# Altium PCB Gagabiro_supply.PcbDoc
Units mm, origin at the board's own origin, x right, y up, seen from the top; angles counter-clockwise.
Board outline 119.89 x 120.02 mm, 2 copper layers (Top Layer, Bottom Layer); 58 components, 26 nets, 129 pads, 2 vias.
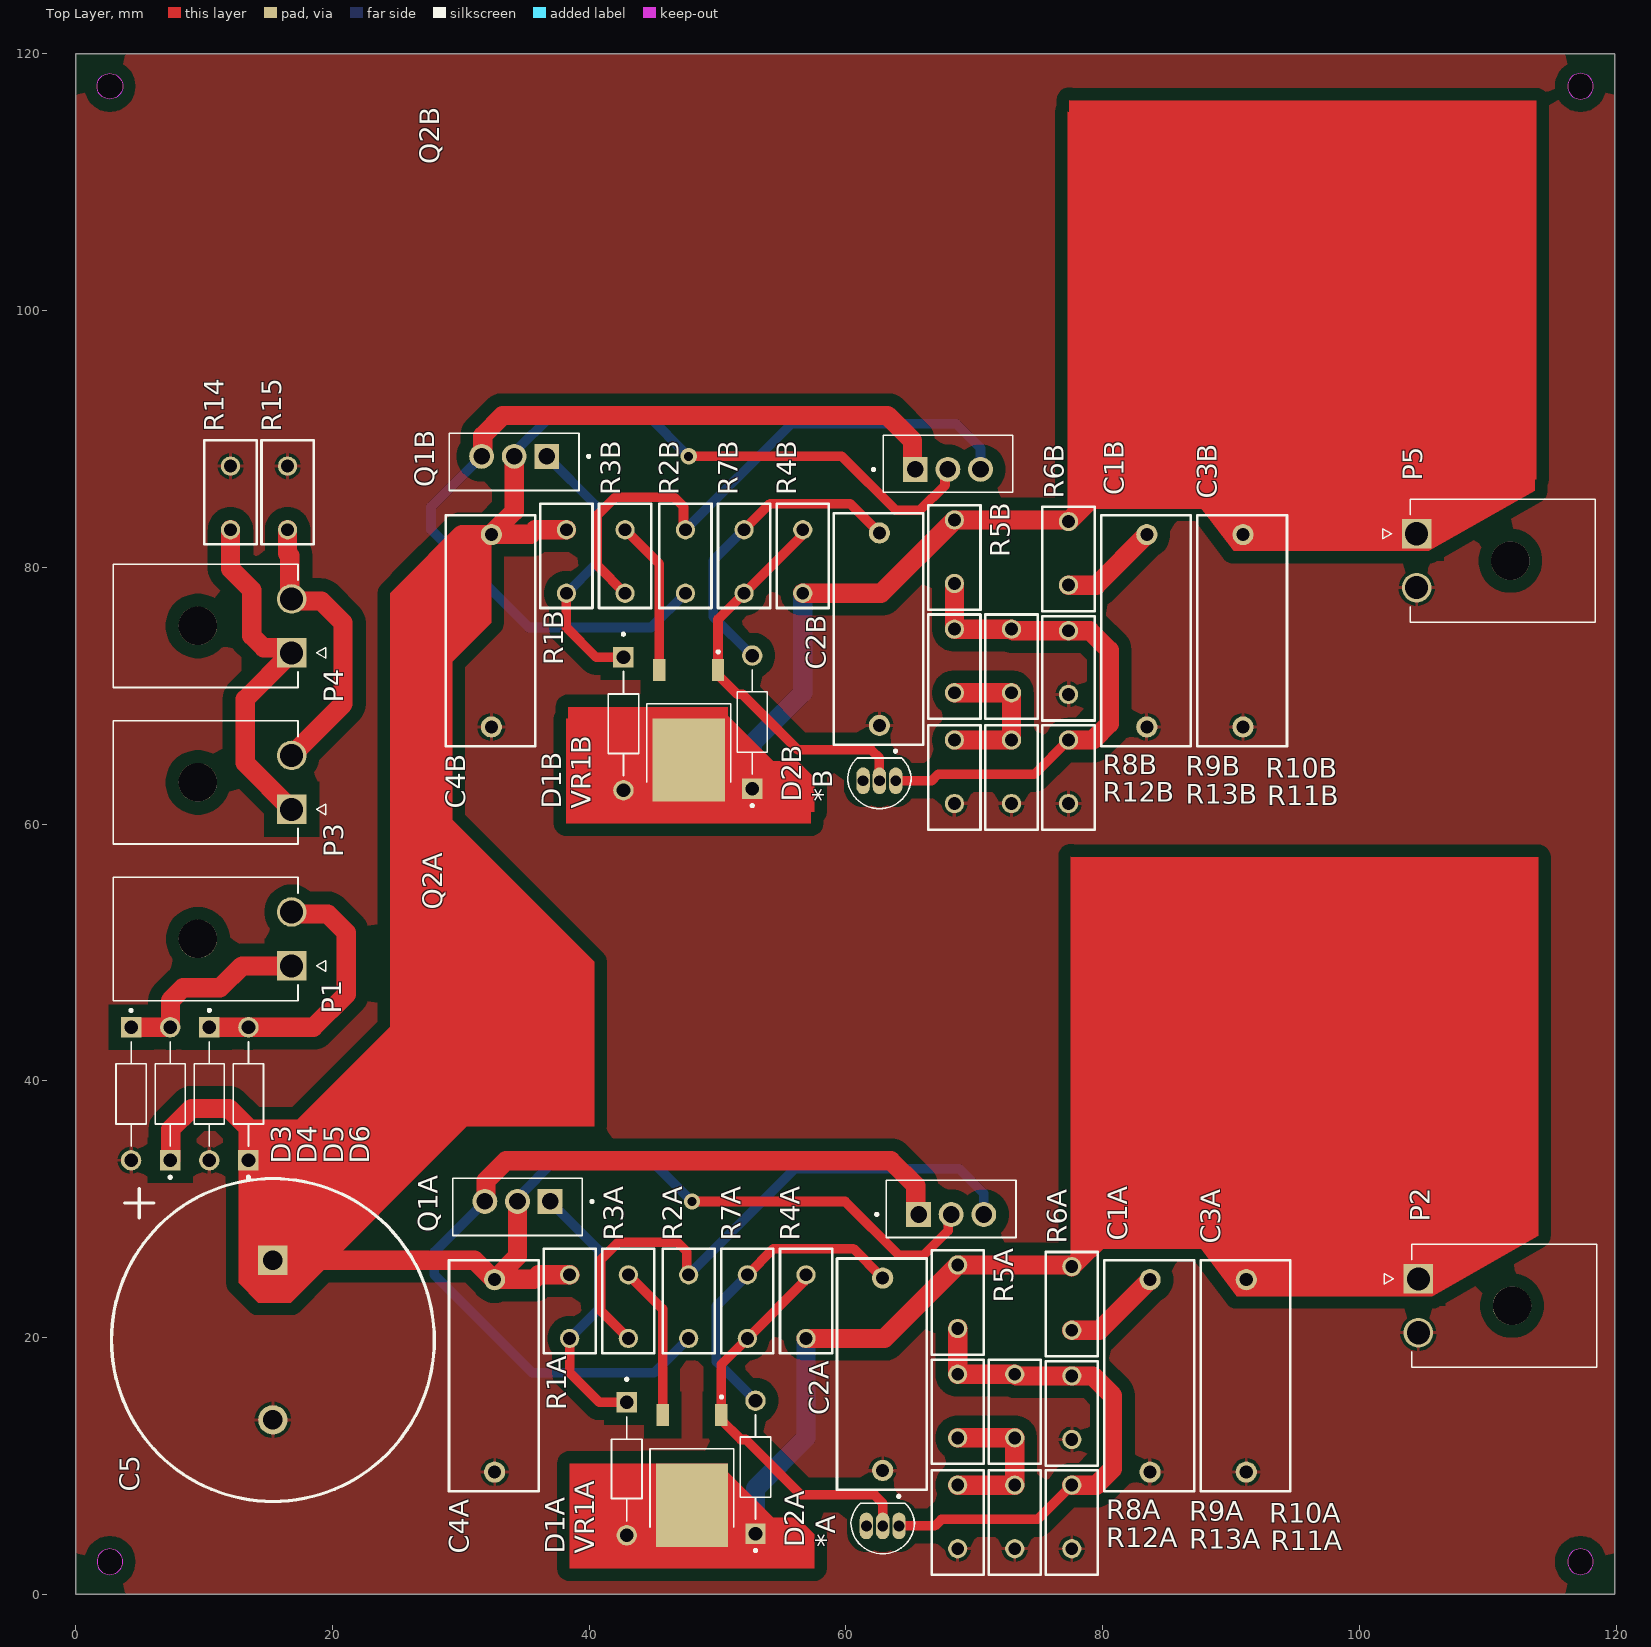
[diagram p0: Top Layer view]
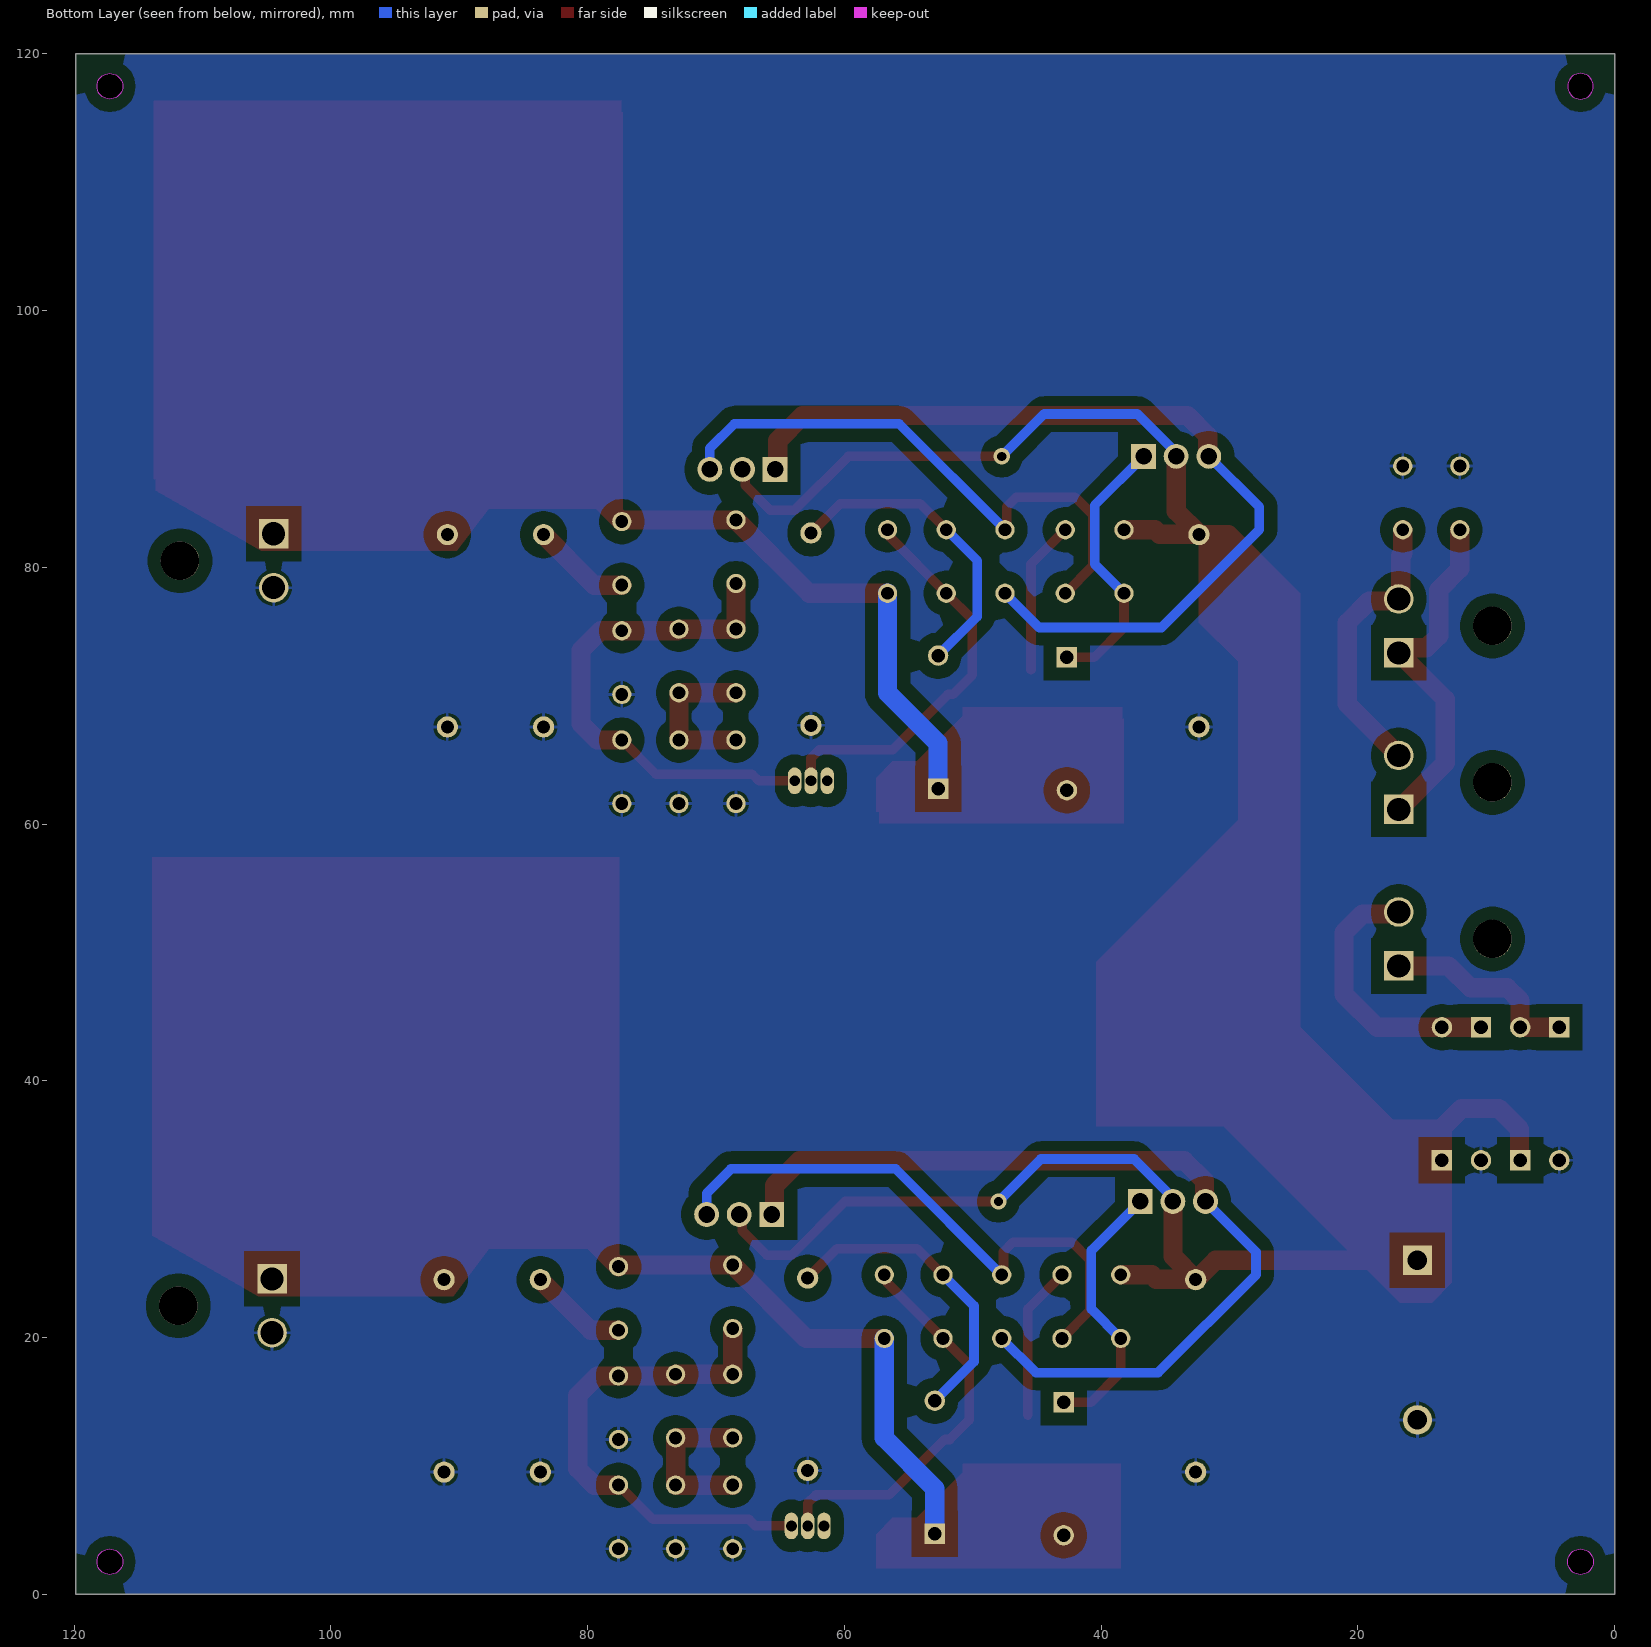
[diagram p1: Bottom Layer view, seen from below]
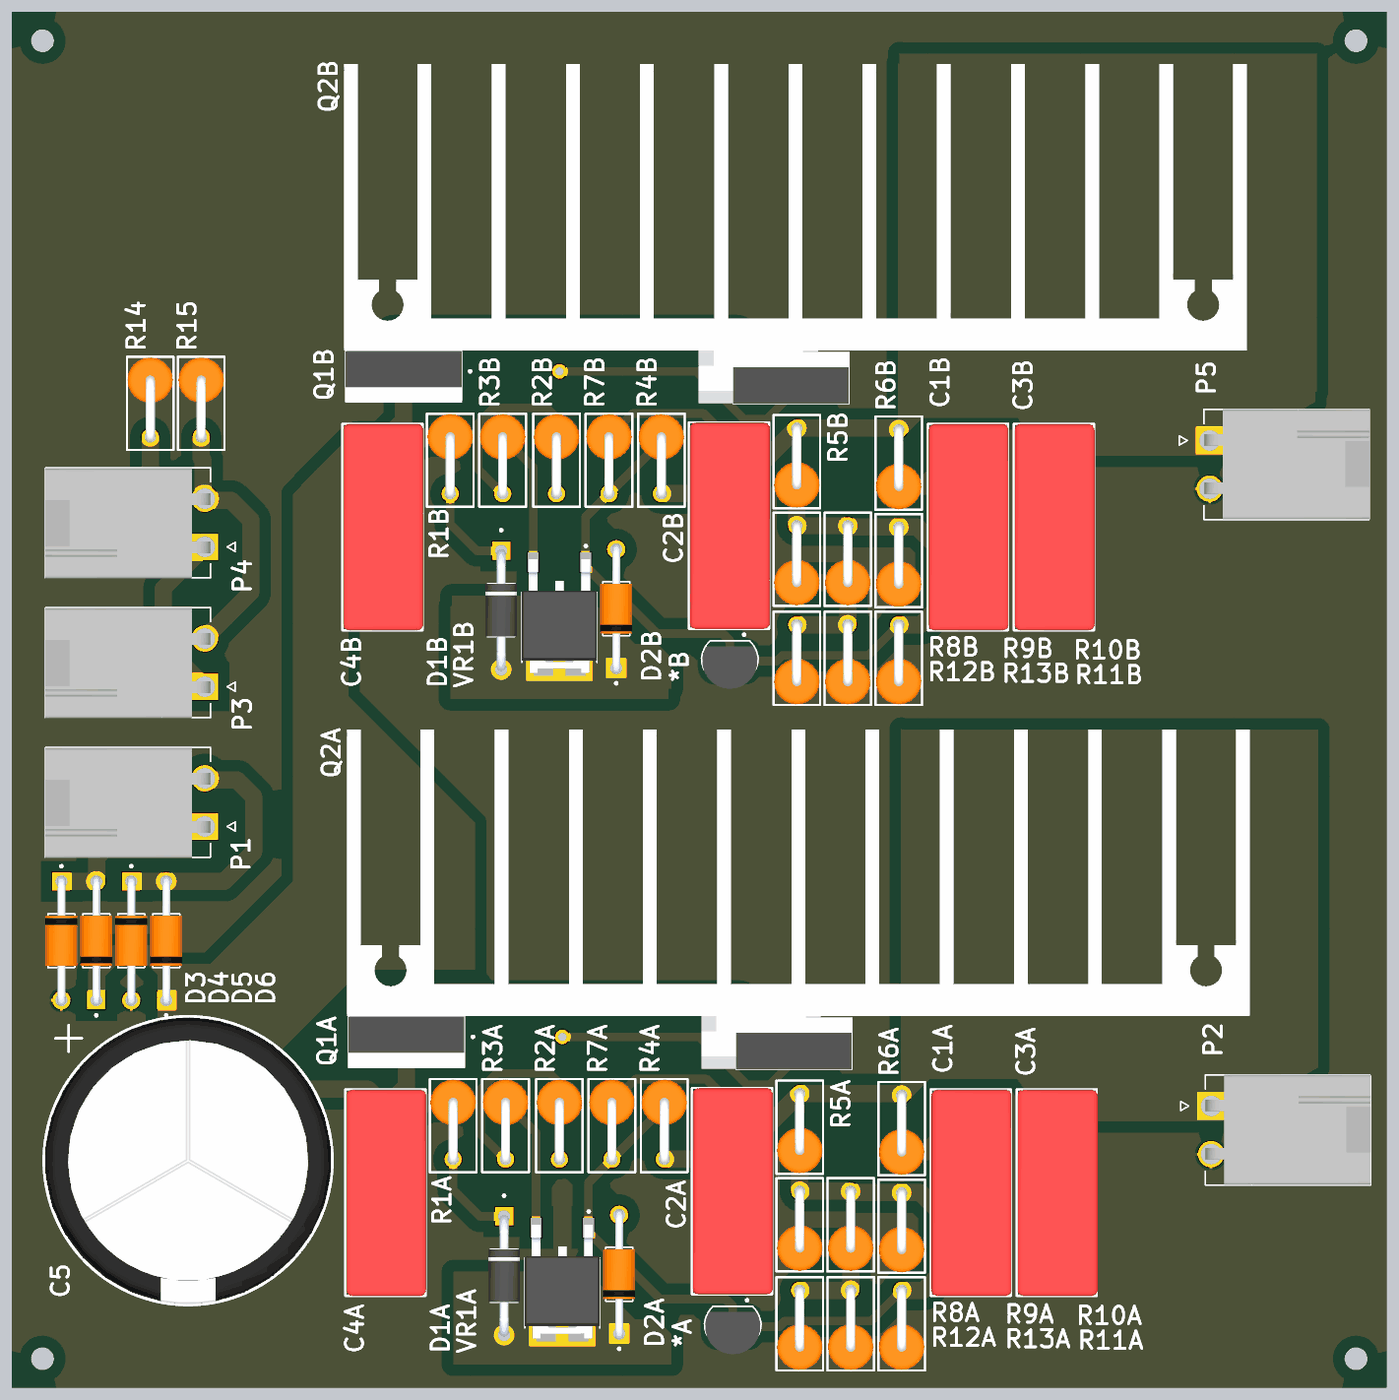
[diagram p2: 3D render of the assembled board from above, using the file's embedded part models]

## Layer stack, top to bottom
Top Solder: solder mask 0.0102, Solder Resist, Dk 3.5
Top Layer: signal copper 0.0356
Dielectric 1: dielectric 0.32, FR-4, Dk 4.8
Bottom Layer: signal copper 0.0356
Bottom Solder: solder mask 0.0102, Solder Resist, Dk 3.5

## Board outline
0,0 0,120.015 119.888,120.015 119.888,0
cut-out: 1.667,2.54 ccw(c2.667,2.54) 2.667,1.54 ccw(c2.667,2.54) 3.667,2.54 ccw(c2.667,2.54) 2.667,3.54 ccw(c2.667,2.54)
cut-out: 2.667,116.475 cw(c2.667,117.475) 1.667,117.475 cw(c2.667,117.475) 2.667,118.475 cw(c2.667,117.475) 3.667,117.475 cw(c2.667,117.475)
cut-out: 116.221,2.54 ccw(c117.221,2.54) 117.221,1.54 ccw(c117.221,2.54) 118.221,2.54 ccw(c117.221,2.54) 117.221,3.54 ccw(c117.221,2.54)
cut-out: 116.221,117.475 ccw(c117.221,117.475) 117.221,116.475 ccw(c117.221,117.475) 118.221,117.475 ccw(c117.221,117.475) 117.221,118.475 ccw(c117.221,117.475)

## Design rules (kind name [scope] priority, off if disabled: settings)
AssemblyTestpoint [All] p1: testpointundercomponent=TRUE minsize=1.016 maxsize=2.54 preferedsize=1.524 minholesize=0 maxholesize=1.016 preferedholesize=0.813 testpointgrid=0.025 usegrid=TRUE gridoriginx=27.559 gridoriginy=8.382 gridtolerance=0 allowsidetop=TRUE allowsidebottom=TRUE
Clearance Clearance_1 [InNet('MAIDA_OUT1') vs All -  InNet('MAIDA_OUT1') - OnLayer('Top Overlay')] p1: gap=1 ignorepadtopadclearanceinfootprint=FALSE
Clearance Clearance_2 [InNet('MAIDA_OUT1') vs All -  InNet('MAIDA_OUT1') - OnLayer('Top Overlay')] p2: gap=1 ignorepadtopadclearanceinfootprint=FALSE
Clearance Clearance_4 [InNamedPolygon('GND_L02_P001')] p3: gap=1 ignorepadtopadclearanceinfootprint=FALSE
Clearance Clearance_3 [InNamedPolygon('GND_L01_P000')] p4: gap=1 ignorepadtopadclearanceinfootprint=FALSE
Clearance Clearance_1 [OnMid vs OnMid] p5: gap=0.254 ignorepadtopadclearanceinfootprint=FALSE sourcerule=41 cellrowname=All cellrowtype=0 cellcolname=All cellcoltype=0 innerlayers=TRUE
Clearance Clearance_2 [(ExistsOnLayer('Top Layer') Or ExistsOnLayer('Bottom Layer')) vs (ExistsOnLayer('Top Layer') Or ExistsOnLayer('Bottom Layer'))] p6: gap=0.254 ignorepadtopadclearanceinfootprint=FALSE sourcerule=41 cellrowname=All cellrowtype=0 cellcolname=All cellcoltype=0 outerlayers=TRUE
Clearance [All] p7: gap=0.254 ignorepadtopadclearanceinfootprint=FALSE ismatrix=TRUE
FabricationTestpoint [All] p1: side=3 testpointundercomponent=TRUE minsize=1.016 maxsize=2.54 preferedsize=1.524 minholesize=0 maxholesize=1.016 preferedholesize=0.813 testpointgrid=0.025 allowsidetop=TRUE allowsidebottom=TRUE usegrid=TRUE gridoriginx=27.559 gridoriginy=8.382 gridtolerance=0
Height [All] p1: minheight=0 maxheight=254 prefheight=12.7
HoleSize [All] p1: absolutevalues=TRUE maxlimit=25.4 minlimit=0.025 maxpercent=80.000 minpercent=20.000
HoleToHoleClearance [All] p1: gap=0.152 allowstackedmicrovias=TRUE
PolygonConnect [All] p1: connectstyle=Relief reliefconductorwidth=0.254 reliefentries=4 polygonreliefangle="90 Angle" airgapwidth=0.254
RoutingVias [All] p1: holewidth=0.711 width=1.27 viastyle="Through Hole" minholewidth=0.711 minwidth=1.27 maxholewidth=0.711 maxwidth=1.27
SolderMaskExpansion [All] p1: expansion=0.102 istentingtop=FALSE
SupplyNets "Schematic Supply Nets" [InNet('GND')] p1: voltage=0.000
Width MaxMinWidth_1 [All] p1: maxlimit=3 minlimit=0.75 preferedwidth=1.5 minimp=50.000000 maximp=50.000000 favimp=50.000000
25 further rules are at their usual default settings.

## Classes and differential pairs
net class MAIDA_OUT[1..2]: MAIDA_OUT1 MAIDA_OUT2
net class MAIDA_IN[1..2]: MAIDA_IN1
channel class Gagabiro_supply_maida: U_Gagabiro_supply_maida1 U_Gagabiro_supply_maida2
component class U_Gagabiro_supply_maida2: *B C1B C2B C3B C4B D1B D2B Q1B Q2B R1B R2B R3B R4B R5B R6B R7B R8B R9B R10B R11B R12B R13B VR1B
component class U_Gagabiro_supply_maida1: *A C1A C2A C3A C4A D1A D2A Q1A Q2A R1A R2A R3A R4A R5A R6A R7A R8A R9A R10A R11A R12A R13A VR1A
component class U_Gagabiro_supply_interface: P1 P2 P3 P4 P5 R14 R15
component class U_Gagabiro_supply_acdc_converter: C5 D3 D4 D5 D6

## Components (designator, comment, footprint, x,y, rotation, side; value= is the part's Value field where it differs from the comment)
*A "LM329" TO92127P495H495-3 62.865,5.334 r0 top (schematic designator *)
*B "LM329" TO92127P495H495-3 62.611,63.373 r0 top (schematic designator *)
C1A "1uF" CAP_panassonic_1u_450V 83.693,9.525 r90 top (schematic designator C1)
C1B "1uF" CAP_panassonic_1u_450V 83.439,67.564 r90 top (schematic designator C1)
C2A "1uF" CAP_panassonic_1u_450V 62.865,9.652 r90 top (schematic designator C2)
C2B "1uF" CAP_panassonic_1u_450V 62.611,67.691 r90 top (schematic designator C2)
C3A "1uF" CAP_panassonic_1u_450V 91.186,9.525 r90 top (schematic designator C3)
C3B "1uF" CAP_panassonic_1u_450V 90.932,67.564 r90 top (schematic designator C3)
C4A "1uF" CAP_panassonic_1u_450V 32.639,9.525 r90 top (schematic designator C4)
C4B "1uF" CAP_panassonic_1u_450V 32.385,67.564 r90 top (schematic designator C4)
C5 "CAP_EL_220u_450V" CAPPRD500W50D630H1120_stand_25x50 15.367,19.812 r270 top value=220uF
D1A "1N4735A" DIOAD1036W78L463D272 42.926,9.779 r270 top (schematic designator D1)
D1B "1N4735A" DIOAD1036W78L463D272 42.672,67.818 r270 top (schematic designator D1)
D2A "1N4001G" DIOAD1036W78L470D235 52.959,9.906 r90 top (schematic designator D2)
D2B "1N4001G" DIOAD1036W78L470D235 52.705,67.945 r90 top (schematic designator D2)
D3 "1N4001G" DIOAD1036W78L470D235 4.318,38.989 r270 top
D4 "1N4001G" DIOAD1036W78L470D235 7.366,38.989 r90 top
D5 "1N4001G" DIOAD1036W78L470D235 10.414,38.989 r270 top
D6 "1N4001G" DIOAD1036W78L470D235 13.462,38.989 r90 top
P1 "1726480102" MOLEX_1726480102 16.825,48.954 r270 top
P2 "1726480102" MOLEX_1726480102 104.587,24.579 r90 top
P3 "1726480102" MOLEX_1726480102 16.825,61.146 r270 top
P4 "1726480102" MOLEX_1726480102 16.825,73.338 r270 top
P5 "1726480102" MOLEX_1726480102 104.46,82.618 r90 top
Q1A "TIP50" TO254P1009X445X1985-3 34.417,30.607 r180 top (schematic designator Q1)
Q1B "TIP50" TO254P1009X445X1985-3 34.163,88.646 r180 top (schematic designator Q1)
Q2A "TIP50_heatsink" TO254P1009X445X1985-3_heatsink 68.199,29.591 r0 top (schematic designator Q2)
Q2B "TIP50_heatsink" TO254P1009X445X1985-3_heatsink 67.945,87.63 r0 top (schematic designator Q2)
R1A "100K" RES_2W_vertical 38.481,24.892 r270 top (schematic designator R1)
R1B "100K" RES_2W_vertical 38.227,82.931 r270 top (schematic designator R1)
R2A "1k" RES_2W_vertical 47.752,24.892 r270 top (schematic designator R2)
R2B "1k" RES_2W_vertical 47.498,82.931 r270 top (schematic designator R2)
R3A "10R" RES_2W_vertical 43.053,24.892 r270 top (schematic designator R3)
R3B "10R" RES_2W_vertical 42.799,82.931 r270 top (schematic designator R3)
R4A "1K5" RES_2W_vertical 56.896,24.892 r270 top (schematic designator R4)
R4B "1K5" RES_2W_vertical 56.642,82.931 r270 top (schematic designator R4)
R5A "1k" RES_2W_vertical 68.707,20.701 r90 top (schematic designator R5)
R5B "1k" RES_2W_vertical 68.453,78.74 r90 top (schematic designator R5)
R6A "2R7" RES_2W_vertical 77.597,20.574 r90 top (schematic designator R6)
R6B "2R7" RES_2W_vertical 77.343,78.613 r90 top (schematic designator R6)
R7A "100R" RES_2W_vertical 52.324,24.892 r270 top (schematic designator R7)
R7B "100R" RES_2W_vertical 52.07,82.931 r270 top (schematic designator R7)
R8A "36K" RES_2W_vertical 68.707,12.192 r90 top (schematic designator R8)
R8B "36K" RES_2W_vertical 68.453,70.231 r90 top (schematic designator R8)
R9A "36K" RES_2W_vertical 73.152,12.192 r90 top (schematic designator R9)
R9B "36K" RES_2W_vertical 72.898,70.231 r90 top (schematic designator R9)
R10A "NC" RES_2W_vertical 77.597,12.065 r90 top (schematic designator R10)
R10B "NC" RES_2W_vertical 77.343,70.104 r90 top (schematic designator R10)
R11A "NC" RES_2W_vertical 77.597,3.556 r90 top (schematic designator R11)
R11B "NC" RES_2W_vertical 77.343,61.595 r90 top (schematic designator R11)
R12A "36K" RES_2W_vertical 68.707,3.556 r90 top (schematic designator R12)
R12B "36K" RES_2W_vertical 68.453,61.595 r90 top (schematic designator R12)
R13A "36K" RES_2W_vertical 73.152,3.556 r90 top (schematic designator R13)
R13B "36K" RES_2W_vertical 72.898,61.595 r90 top (schematic designator R13)
R14 "220R" RES_2W_vertical 12.065,87.884 r270 top
R15 "220R" RES_2W_vertical 16.51,87.884 r270 top
VR1A "LM317AMDT/NOPB" TO228P991X255-3N 48.006,9.271 r270 top (schematic designator VR1)
VR1B "LM317AMDT/NOPB" TO228P991X255-3N 47.752,67.31 r270 top (schematic designator VR1)

## Footprints (in the part's own frame and the unit in brackets; to place one, negate y for a bottom-side part, rotate by r counter-clockwise, add the part's x,y. Pads: shape width x height; smd on the part's side, far side on the other; paste and mask are expansions set on the pad)
CAP_panassonic_1u_450V [mil]
  round 65 hole 40: 1(0,0) 2(590,0)
  silkscreen extent -59,-135 650,140, body extent -59,-138 649,138, height 551
CAPPRD500W50D630H1120_stand_25x50 [mil]
  round 90 hole 60: N(245,0)
  rect 90x90 hole 60: P(-245,0)
  silkscreen extent -495,-495 495,495, body extent -492,-492 492,492, height 1990
DIOAD1036W78L463D272 [mm]
  rect 1.59x1.59 / inner round 1.59 / far side rect 1.59x1.59 hole 1.06: 1(-5.18,0)
  round 1.59 hole 1.06: 2(5.18,0)
  silkscreen extent -7.07,-1.19 4.07,1.19, body extent -5.29,-1.36 5.29,1.36, height 2.72
DIOAD1036W78L470D235 [mm]
  round 1.59 hole 1.06: A(5.18,0)
  rect 1.59x1.59 hole 1.06: C(-5.18,0)
  silkscreen extent -6.6,-1.17 4.07,1.17, body extent -5.65,-1.4 5.65,1.4, height 2.8
MOLEX_1726480102 [mm]
  rect 2.3x2.3 / inner round 2.3 / far side rect 2.3x2.3 hole 1.8 mask+0.076: 1(0,0)
  round 2.3 hole 1.8 mask+0.076: 2(-4.2,0)
  round 3 hole 3 unplated mask+0.076: ""(-2.1,-7.3)
  silkscreen extent -6.9,-13.9 2.7,2.65, body extent -6.86,-13.93 2.74,0.47, height 7.2
RES_2W_vertical [mm]
  round 1.5 hole 1: 1(0,0) 2(4.953,0)
  silkscreen extent -2.03,-2.03 6.1,2.03, body extent -2,-2 5.35,2, height 13.73
TO228P991X255-3N [mm]
  rect 1.73x0.96 smd: 1(-4.7,2.285) 3(-4.7,-2.285)
  rect 6.49x5.63 smd paste-4: 4(2.32,0)
  silkscreen extent -6.2,-3.27 4.04,3.27, body extent -4.95,-3.27 4.95,3.27, height 2.55
TO254P1009X445X1985-3 [mm]
  rect 1.935x1.935 / inner round 1.935 / far side rect 1.935x1.935 hole 1.29: 1(-2.54,0)
  round 1.935 hole 1.29: 2(0,0) 3(2.54,0)
  silkscreen extent -5.9,-1.79 5.05,2.66, body extent -5.05,-1.79 5.05,2.65, height 19.84
TO254P1009X445X1985-3_heatsink [mm]
  rect 1.935x1.935 / inner round 1.935 / far side rect 1.935x1.935 hole 1.29: 1(-2.54,0)
  round 1.935 hole 1.29: 2(0,0) 3(2.54,0)
  silkscreen extent -5.9,-1.79 5.05,2.66, body extent -38.99,-1.79 39.75,27.82, height 35.56
TO92127P495H495-3 [mm]
  oval 1.04x2.08 hole 0.84: 1(-1.27,0) 2(0,0) 3(1.27,0)
  silkscreen extent -2.48,-2.16 2.48,2.4, body extent -2.41,-2.41 2.41,1.29, height 5.96

## Part data
C1A C1B C2A C2B C3A C3B C4A C4B: library part CAP_POLY_1u, "Capacitor, Silver Mica", Part Number=CMICA_47PF
C5: "220F 16V Aluminum Electrolytic Capacitors Radial, Can 1000 Hrs @ 105C", Package="RADIAL-2 Panasonic", Availability="In Stock", Check_prices=https://www.snapeda.com/parts/EEU-HD1C221B/Panasonic/view-part/?ref=eda, MF=Panasonic, MP=EEU-HD1C221B, Price=None, Purchase-URL=https://pricing.snapeda.com/search/part/EEU-HD1C221B/?ref=eda, SnapEDA_Link=https://www.snapeda.com/parts/EEU-HD1C221B/Panasonic/view-part/?ref=snap
D1A D1B: "Zener Diode 6.2V 1W Â±5% Through Hole DO-204AL (DO-41)", Package="DO-41 ON Semiconductor", Check_prices=https://www.snapeda.com/parts/1N4735A/Onsemi/view-part/?ref=eda, MF="ON Semiconductor", MP=1N4735A, SnapEDA_Link=https://www.snapeda.com/parts/1N4735A/Onsemi/view-part/?ref=snap
D2A D2B D3 D4 D5 D6: "1A, 50V, Standard Recovery Rectifier", Package="DO-41-2 Taiwan Semiconductor", Availability="In Stock", Check_prices=https://www.snapeda.com/parts/1N4001G/Taiwan+Semiconductor/view-part/?ref=eda, MF="Taiwan Semiconductor", MP=1N4001G, Price=None, Purchase-URL=https://pricing.snapeda.com/search/part/1N4001G/?ref=eda, SnapEDA_Link=https://www.snapeda.com/parts/1N4001G/Taiwan+Semiconductor/view-part/?ref=snap
P1 P2 P3 P4 P5: "Connector Header Surface Mount, Right Angle 2 position 0.079 (2.00mm)", Package=None, Availability="In Stock", Check_prices=https://www.snapeda.com/parts/S2B-PH-SM4-TB/JST+Sales+America+Inc./view-part/?ref=eda, MF="JST Sales", MP=S2B-PH-SM4-TB, Price=None, Purchase-URL=https://pricing.snapeda.com/search/part/S2B-PH-SM4-TB/?ref=eda, SnapEDA_Link=https://www.snapeda.com/parts/S2B-PH-SM4-TB/JST+Sales+America+Inc./view-part/?ref=snap
Q1A Q1B Q2A Q2B: "Bipolar (BJT) Transistor NPN 400 V 1 A 10MHz 2 W Through Hole TO-220-3", Package="TO-220-3 onsemi", Availability="In Stock", Check_prices=https://www.snapeda.com/parts/TIP50/Onsemi/view-part/?ref=eda, MF="ON Semiconductor", MP=TIP50, Price=None, Purchase-URL=https://pricing.snapeda.com/search/part/TIP50/?ref=eda, SnapEDA_Link=https://www.snapeda.com/parts/TIP50/Onsemi/view-part/?ref=snap
R1A R1B: library part R_2W_vertical_100K, "Resistor, 2W", Part Number=R2W, Author=colombari, ComponentLink1Description=Datasheet, ComponentLink1URL=N.A., ComponentLink2Description="Supplier link", ComponentLink2URL=N.A.
R2A R2B R5A R5B: library part R_2W_vertical_1k, "Resistor, 2W", Part Number=R2W, Author=colombari, ComponentLink1Description=Datasheet, ComponentLink1URL=N.A., ComponentLink2Description="Supplier link", ComponentLink2URL=N.A.
R3A R3B: library part R_2W_vertical_10R, "Resistor, 2W", Part Number=R2W, Author=colombari, ComponentLink1Description=Datasheet, ComponentLink1URL=N.A., ComponentLink2Description="Supplier link", ComponentLink2URL=N.A.
R4A R4B: library part R_2W_vertical_1K5, "Resistor, 2W", Part Number=R2W, Author=colombari, ComponentLink1Description=Datasheet, ComponentLink1URL=N.A., ComponentLink2Description="Supplier link", ComponentLink2URL=N.A.
R6A R6B: library part R_2W_vertical_2R7, "Resistor, 2W", Part Number=R2W, Author=colombari, ComponentLink1Description=Datasheet, ComponentLink1URL=N.A., ComponentLink2Description="Supplier link", ComponentLink2URL=N.A.
R7A R7B: library part R_2W_vertical_100R, "Resistor, 2W", Part Number=R2W, Author=colombari, ComponentLink1Description=Datasheet, ComponentLink1URL=N.A., ComponentLink2Description="Supplier link", ComponentLink2URL=N.A.
R8A R8B R9A R9B R12A R12B R13A R13B: library part R_2W_vertical_36K, "Resistor, 2W", Part Number=R2W, Author=colombari, ComponentLink1Description=Datasheet, ComponentLink1URL=N.A., ComponentLink2Description="Supplier link", ComponentLink2URL=N.A.
R10A R10B R11A R11B: library part R_2W_vertical_NC, "Resistor, 2W", Part Number=R2W, Author=colombari, ComponentLink1Description=Datasheet, ComponentLink1URL=N.A., ComponentLink2Description="Supplier link", ComponentLink2URL=N.A.
R14 R15: library part R_2W_vertical_220R, "Resistor, 2W", Part Number=R2W, Author=colombari, ComponentLink1Description=Datasheet, ComponentLink1URL=N.A., ComponentLink2Description="Supplier link", ComponentLink2URL=N.A.
VR1A VR1B: Package=None, Availability=Unavailable, MP=LM317AMDT/NOPB, Price=None

## Via types
v1: diameter 1.27, hole 0.711, Top Layer to Bottom Layer, 2 vias

## Nets (pads, with @x,y where several pads share a name; then routed paths per layer and width w, separated by ;. In a path a pad name is that pad's centre, name@x,y a point inside that pad or via, vN(x,y) a via of type N, cw(c..) or ccw(c..) an arc to the next point about the centre after c; other vN are vias at no path point)
6V3+: P3.1 P4.1 R14.2 | length 27.8
  Top Layer w1.5: R14.2 12.065,79.883 13.716,78.232 13.716,74.676 14.654,73.738 16.425,73.738 P4.1 13.208,69.721 13.208,64.763 P3.1
6V3-: P3.2 P4.2 R15.2 | length 22.3
  Top Layer w1.5: R15.2 16.51,81.069 16.672,80.908 16.672,77.691 P4.2 16.978,77.385 19.135,77.385 20.828,75.692 20.828,69.349 P3.2
GND: C1A.1 C1B.1 C2A.1 C2B.1 C3A.1 C3B.1 C4A.1 C4B.1 C5.N D3.A D5.A P2.2 P5.2 R10A.1 R10B.1 R11A.1 R11B.1 R12A.1 R12B.1 R13A.1 R13B.1 R14.1 R15.1
MAIDA_IN1: C4A.2 C4B.2 C5.P D4.C D6.C Q1A.2 Q1B.2 Q2A.2 Q2B.2 R1A.1 R1B.1 | length 168.1
  Top Layer w0.75: v1(47.752,88.646) 59.69,88.646 63.881,84.455 65.786,84.455 67.718,86.387 67.718,87.403 Q2B.2 ; v1(48.006,30.607) 59.944,30.607 64.135,26.416 66.04,26.416 67.972,28.348 67.972,29.364 Q2A.2
  Top Layer w1.5: D4.C 7.411,33.854 7.411,36.24 9.017,37.846 11.938,37.846 13.462,36.322 D6.C 13.462,27.94 C5.P 31.074,26.035 C4A.2@32.598,24.511 ; 25.908,78.359 30.099,82.55 C4B.2 32.385,82.591 34.163,84.369 Q1B.2 ; C4B.2@32.414,82.579 35.455,82.579 35.807,82.931 R1B.1 ; C4A.2 32.639,24.552 34.417,26.33 Q1A.2 ; C4A.2@32.668,24.54 35.709,24.54 36.061,24.892 R1A.1
  Top Layer w3: C5.P 25.908,36.576
  Bottom Layer w0.75: Q1B.2 34.163,88.931 37.18,91.948 44.45,91.948 v1(47.752,88.646) ; Q1A.2 34.417,30.892 37.434,33.909 44.704,33.909 v1(48.006,30.607)
MAIDA_OUT1: C3A.2 D1A.2 D2A.C P2.1 R4A.2 R5A.2 R6A.2 VR1A.4 | length 75.8
  Top Layer w1.5: D1A.2 45.941,4.599 48.006,6.664 VR1A.4@48.006,6.791 ; VR1A.4 VR1A.4@48.006,6.791 ; D2A.C 50.071,4.726 VR1A.4@48.006,6.791 ; R4A.2 62.992,19.939 R5A.2 77.47,25.654 R6A.2 80.137,28.067 87.63,28.067 C3A.2 91.215,24.482 98.708,24.482 98.806,24.384
  Bottom Layer w1.5: D2A.C 52.959,8.255 56.896,12.192 R4A.2
MAIDA_OUT2: C3B.2 D1B.2 D2B.C P5.1 R4B.2 R5B.2 R6B.2 VR1B.4 | length 75.8
  Top Layer w1.5: D1B.2 45.687,62.638 47.752,64.703 VR1B.4@47.752,64.83 ; VR1B.4 VR1B.4@47.752,64.83 ; D2B.C 49.817,62.765 VR1B.4@47.752,64.83 ; R4B.2 62.738,77.978 R5B.2 77.216,83.693 R6B.2 79.883,86.106 87.376,86.106 C3B.2 90.961,82.521 98.454,82.521 98.552,82.423
  Bottom Layer w1.5: D2B.C 52.705,66.294 56.642,70.231 R4B.2
Net*A_2: *A.2 R4A.1 R7A.2 VR1A.1 | length 31.1
  Top Layer w0.75: R4A.1 56.752,24.748 56.752,24.368 R7A.2 50.291,17.906 VR1A.1 50.291,13.586 51.812,12.065 52.197,12.065 56.515,7.747 62.23,7.747 62.865,7.112 *A.2
Net*A_3: *A.3 R5A.1 R8A.2 R9A.2 R10A.2 R11A.2 | length 40.5
  Top Layer w0.75: *A.3 66.929,5.334 67.437,5.842 74.93,5.842 R11A.2
  Top Layer w1.5: R5A.1 R8A.2 R9A.2 73.279,17.018 79.248,17.018 80.772,15.494 80.772,9.779 79.502,8.509 R11A.2
Net*B_2: *B.2 R4B.1 R7B.2 VR1B.1 | length 31.1
  Top Layer w0.75: R4B.1 56.498,82.787 56.498,82.407 R7B.2 50.037,75.945 VR1B.1 50.037,71.625 51.558,70.104 51.943,70.104 56.261,65.786 61.976,65.786 62.611,65.151 *B.2
Net*B_3: *B.3 R5B.1 R8B.2 R9B.2 R10B.2 R11B.2 | length 40.5
  Top Layer w0.75: *B.3 66.675,63.373 67.183,63.881 74.676,63.881 R11B.2
  Top Layer w1.5: R5B.1 R8B.2 R9B.2 73.025,75.057 78.994,75.057 80.518,73.533 80.518,67.818 79.248,66.548 R11B.2
NetC1A_2: C1A.2 R6A.1 | length 7.7
  Top Layer w1.5: R6A.1 79.756,20.574 C1A.2
NetC1B_2: C1B.2 R6B.1 | length 7.7
  Top Layer w1.5: R6B.1 79.502,78.613 C1B.2
NetC2A_2: C2A.2 D2A.A R7A.1 | length 24.4
  Top Layer w0.75: R7A.1 54.356,26.924 60.579,26.924 C2A.2
  Bottom Layer w0.75: R7A.1 49.911,22.479 49.911,18.134 D2A.A
NetC2B_2: C2B.2 D2B.A R7B.1 | length 24.4
  Top Layer w0.75: R7B.1 54.102,84.963 60.325,84.963 C2B.2
  Bottom Layer w0.75: R7B.1 49.657,80.518 49.657,76.173 D2B.A
NetD1A_1: D1A.1 Q1A.1 R1A.2 | length 21.3
  Top Layer w0.75: R1A.2 38.481,17.272 40.794,14.959 D1A.1
  Bottom Layer w0.75: Q1A.1 40.767,26.797 40.767,22.225 R1A.2
NetD1B_1: D1B.1 Q1B.1 R1B.2 | length 21.3
  Top Layer w0.75: R1B.2 38.227,75.311 40.54,72.998 D1B.1
  Bottom Layer w0.75: Q1B.1 40.513,84.836 40.513,80.264 R1B.2
NetD3_C: D3.C D4.A P1.1 | length 15.7
  Top Layer w1.5: D3.C D4.A 7.383,44.186 7.383,46.256 8.372,47.244 11.241,47.244 12.95,48.954 P1.1
NetD5_C: D5.C D6.A P1.2 | length 21.5
  Top Layer w1.5: D5.C D6.A 18.515,44.169 21.082,46.736 21.082,51.562 19.643,53.001 16.978,53.001 P1.2
NetQ1A_3: Q1A.3 Q2A.1 R2A.2 | length 70.3
  Top Layer w1.5: Q1A.3 31.96,30.69 31.96,32.214 33.528,33.782 63.5,33.782 65.441,31.841 65.441,29.809 Q2A.1
  Bottom Layer w0.75: Q1A.3 27.94,26.67 27.94,24.892 35.56,17.272 45.085,17.272 R2A.2
NetQ1B_3: Q1B.3 Q2B.1 R2B.2 | length 70.3
  Top Layer w1.5: Q1B.3 31.706,88.729 31.706,90.253 33.274,91.821 63.246,91.821 65.187,89.88 65.187,87.848 Q2B.1
  Bottom Layer w0.75: Q1B.3 27.686,84.709 27.686,82.931 35.306,75.311 44.831,75.311 R2B.2
NetQ2A_3: Q2A.3 R2A.1 R3A.2 | length 45.3
  Top Layer w0.75: R3A.2 40.894,22.098 40.894,26.035 42.291,27.432 46.863,27.432 47.608,26.687 47.608,25.036 R2A.1
  Bottom Layer w0.75: R2A.1 56.007,33.147 68.834,33.147 70.739,31.242 Q2A.3
NetQ2B_3: Q2B.3 R2B.1 R3B.2 | length 45.3
  Top Layer w0.75: R3B.2 40.64,80.137 40.64,84.074 42.037,85.471 46.609,85.471 47.354,84.726 47.354,83.075 R2B.1
  Bottom Layer w0.75: R2B.1 55.753,91.186 68.58,91.186 70.485,89.281 Q2B.3
NetR3A_1: R3A.1 VR1A.3 | length 12
  Top Layer w0.75: R3A.1 45.721,22.224 VR1A.3
NetR3B_1: R3B.1 VR1B.3 | length 12
  Top Layer w0.75: R3B.1 45.467,80.263 VR1B.3
NetR8A_1: R8A.1 R9A.1 R12A.2 R13A.2 | length 12.6
  Top Layer w1.5: R12A.2 R13A.2 R9A.1 R8A.1
NetR8B_1: R8B.1 R9B.1 R12B.2 R13B.2 | length 12.6
  Top Layer w1.5: R12B.2 R13B.2 R9B.1 R8B.1
pads on no net: *A.1 *B.1 P1. P2. P3. P4. P5.

## Polygon pours and split planes (outlines as drawn)
GND on Top Layer "GND_L01_P000" (solid, remove dead copper, pour order 0): 0,0 0,120.015 119.888,120.015 119.888,0
GND on Bottom Layer "GND_L02_P001" (solid, remove dead copper, pour order 1): 0,0 0,120.015 119.888,120.015 119.888,0

## Other copper
Top Layer:
  region net MAIDA_IN1: 30.48,36.449 40.386,36.449 40.386,49.276 29.337,60.325 29.337,72.644 32.385,75.692 32.385,82.591 30.14,82.591 25.908,78.359 25.908,36.957 25.908,79.375 24.511,77.978 24.511,44.196 17.272,36.957 12.954,36.957 12.7,36.703 12.7,24.257 14.224,22.733 16.764,22.733
  region net MAIDA_OUT2: 38.227,68.199 38.227,60.071 57.277,60.071 57.277,62.738 56.007,64.008 54.102,64.008 50.546,67.564 50.546,68.199 45.085,68.199
  region net MAIDA_OUT2: 77.279,83.629 77.279,115.506 77.343,115.443 113.665,115.443 113.665,85.979 105.41,81.28 98.503,81.28 90.201,81.28 87.407,84.963 78.486,84.963
  region net MAIDA_OUT2: 38.227,68.199 38.227,60.071 57.277,60.071 57.277,62.738 56.007,64.008 54.102,64.008 50.546,67.564 50.546,68.199 45.085,68.199
  region net MAIDA_OUT2: 77.279,83.629 77.279,115.506 77.343,115.443 113.665,115.443 113.665,85.979 102.01,85.979 98.503,82.472 98.425,82.55 90.678,82.55 88.265,84.963 78.486,84.963
  region net MAIDA_OUT1: 77.534,25.59 77.534,57.468 77.597,57.404 113.919,57.404 113.919,27.94 105.664,23.241 98.757,23.241 90.455,23.241 87.661,26.924 78.74,26.924
  region net MAIDA_OUT2: 38.481,69.088 38.481,60.96 57.531,60.96 57.531,63.627 56.261,64.897 54.356,64.897 50.8,68.453 50.8,69.088 45.339,69.088
  region net MAIDA_OUT2: 38.354,69.088 38.354,60.96 57.404,60.96 57.404,63.627 56.134,64.897 54.229,64.897 50.673,68.453 50.673,69.088 45.212,69.088
  region net MAIDA_OUT2: 77.406,84.519 77.406,116.395 77.47,116.332 113.792,116.332 113.792,86.868 102.137,86.868 98.63,83.361 98.552,83.439 90.805,83.439 89.535,84.709 89.408,84.582 77.343,84.582
  region net MAIDA_OUT1: 38.481,10.16 38.481,2.032 57.531,2.032 57.531,4.699 56.261,5.969 54.356,5.969 50.8,9.525 50.8,10.16 45.339,10.16

## Silkscreen, mask and mechanical layers (free items; w line width, h text height)
Mechanical 1:
  circle w0.254: c2.667,2.54 r1
  circle w0.254: c2.667,117.475 r1
  circle w0.254: c117.221,2.54 r1
  circle w0.254: c117.221,117.475 r1
  lines w0.254: 0,0 119.888,0 119.888,120.015 0,120.015 0,0

## Text inside footprints (layer, text, board x,y; h text height)
P1: Mechanical 13 "NPTH D3.00+/-0.05" at 19.245,57.154 h0.5 r270; Mechanical 13 "PTH D1.80+/-0.05" at 19.991,57.154 h0.5 r270
P2: Mechanical 13 "NPTH D3.00+/-0.05" at 102.167,16.379 h0.5 r90; Mechanical 13 "PTH D1.80+/-0.05" at 101.421,16.379 h0.5 r90
P3: Mechanical 13 "NPTH D3.00+/-0.05" at 19.245,69.346 h0.5 r270; Mechanical 13 "PTH D1.80+/-0.05" at 19.991,69.346 h0.5 r270
P4: Mechanical 13 "NPTH D3.00+/-0.05" at 19.245,81.538 h0.5 r270; Mechanical 13 "PTH D1.80+/-0.05" at 19.991,81.538 h0.5 r270
P5: Mechanical 13 "PTH D1.80+/-0.05" at 101.294,74.418 h0.5 r90; Mechanical 13 "NPTH D3.00+/-0.05" at 102.04,74.418 h0.5 r90